# Altium PCB Boost.PcbDoc
Units mm, origin at the board's own origin, x right, y up, seen from the top; angles counter-clockwise.
Board outline 55.14 x 49.68 mm, 2 copper layers (Top Layer, Bottom Layer); 20 components, 7 nets, 39 pads, 67 vias.
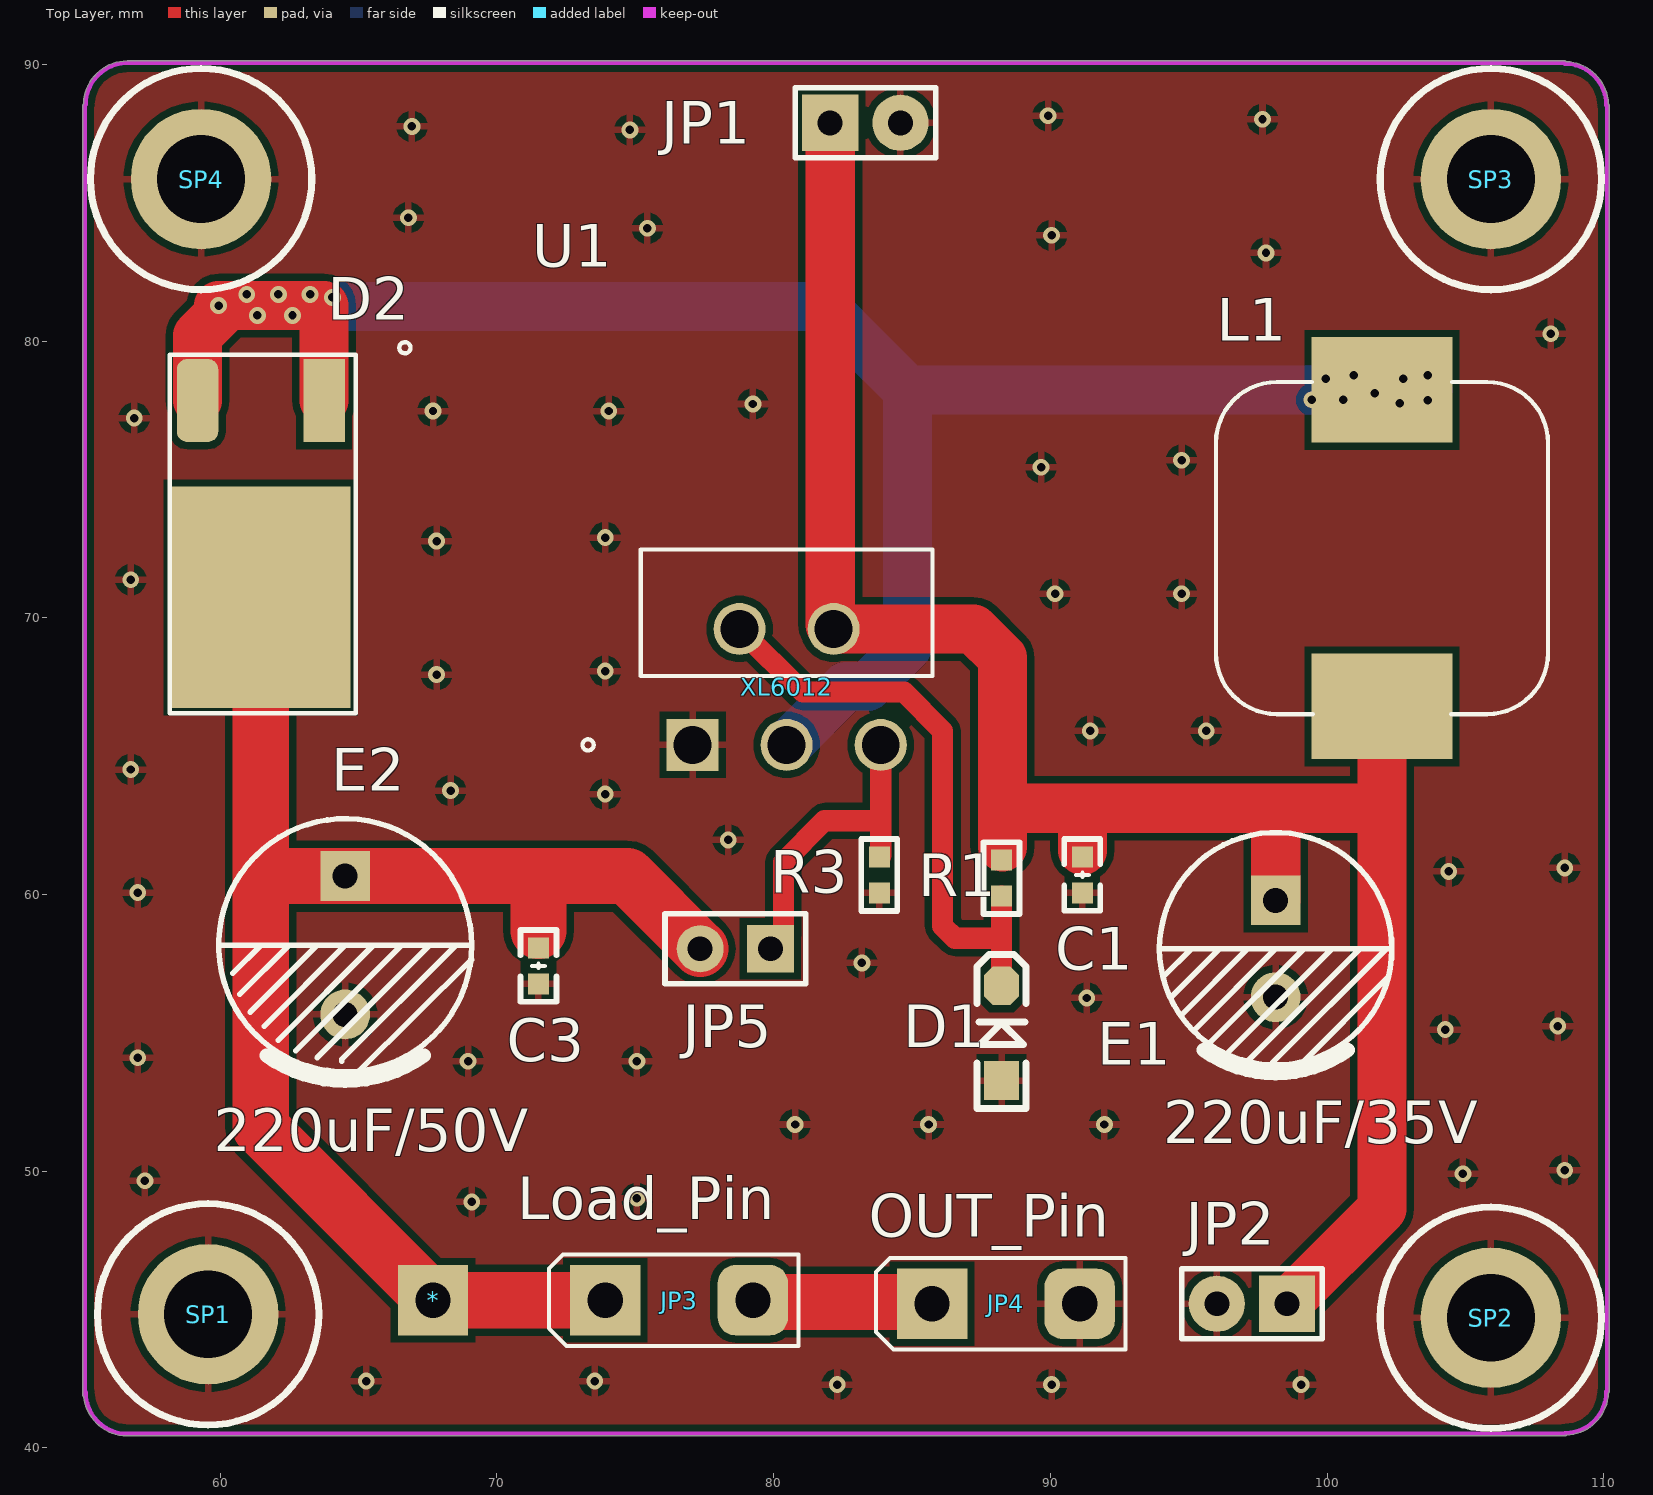
[diagram p0: Top Layer view]
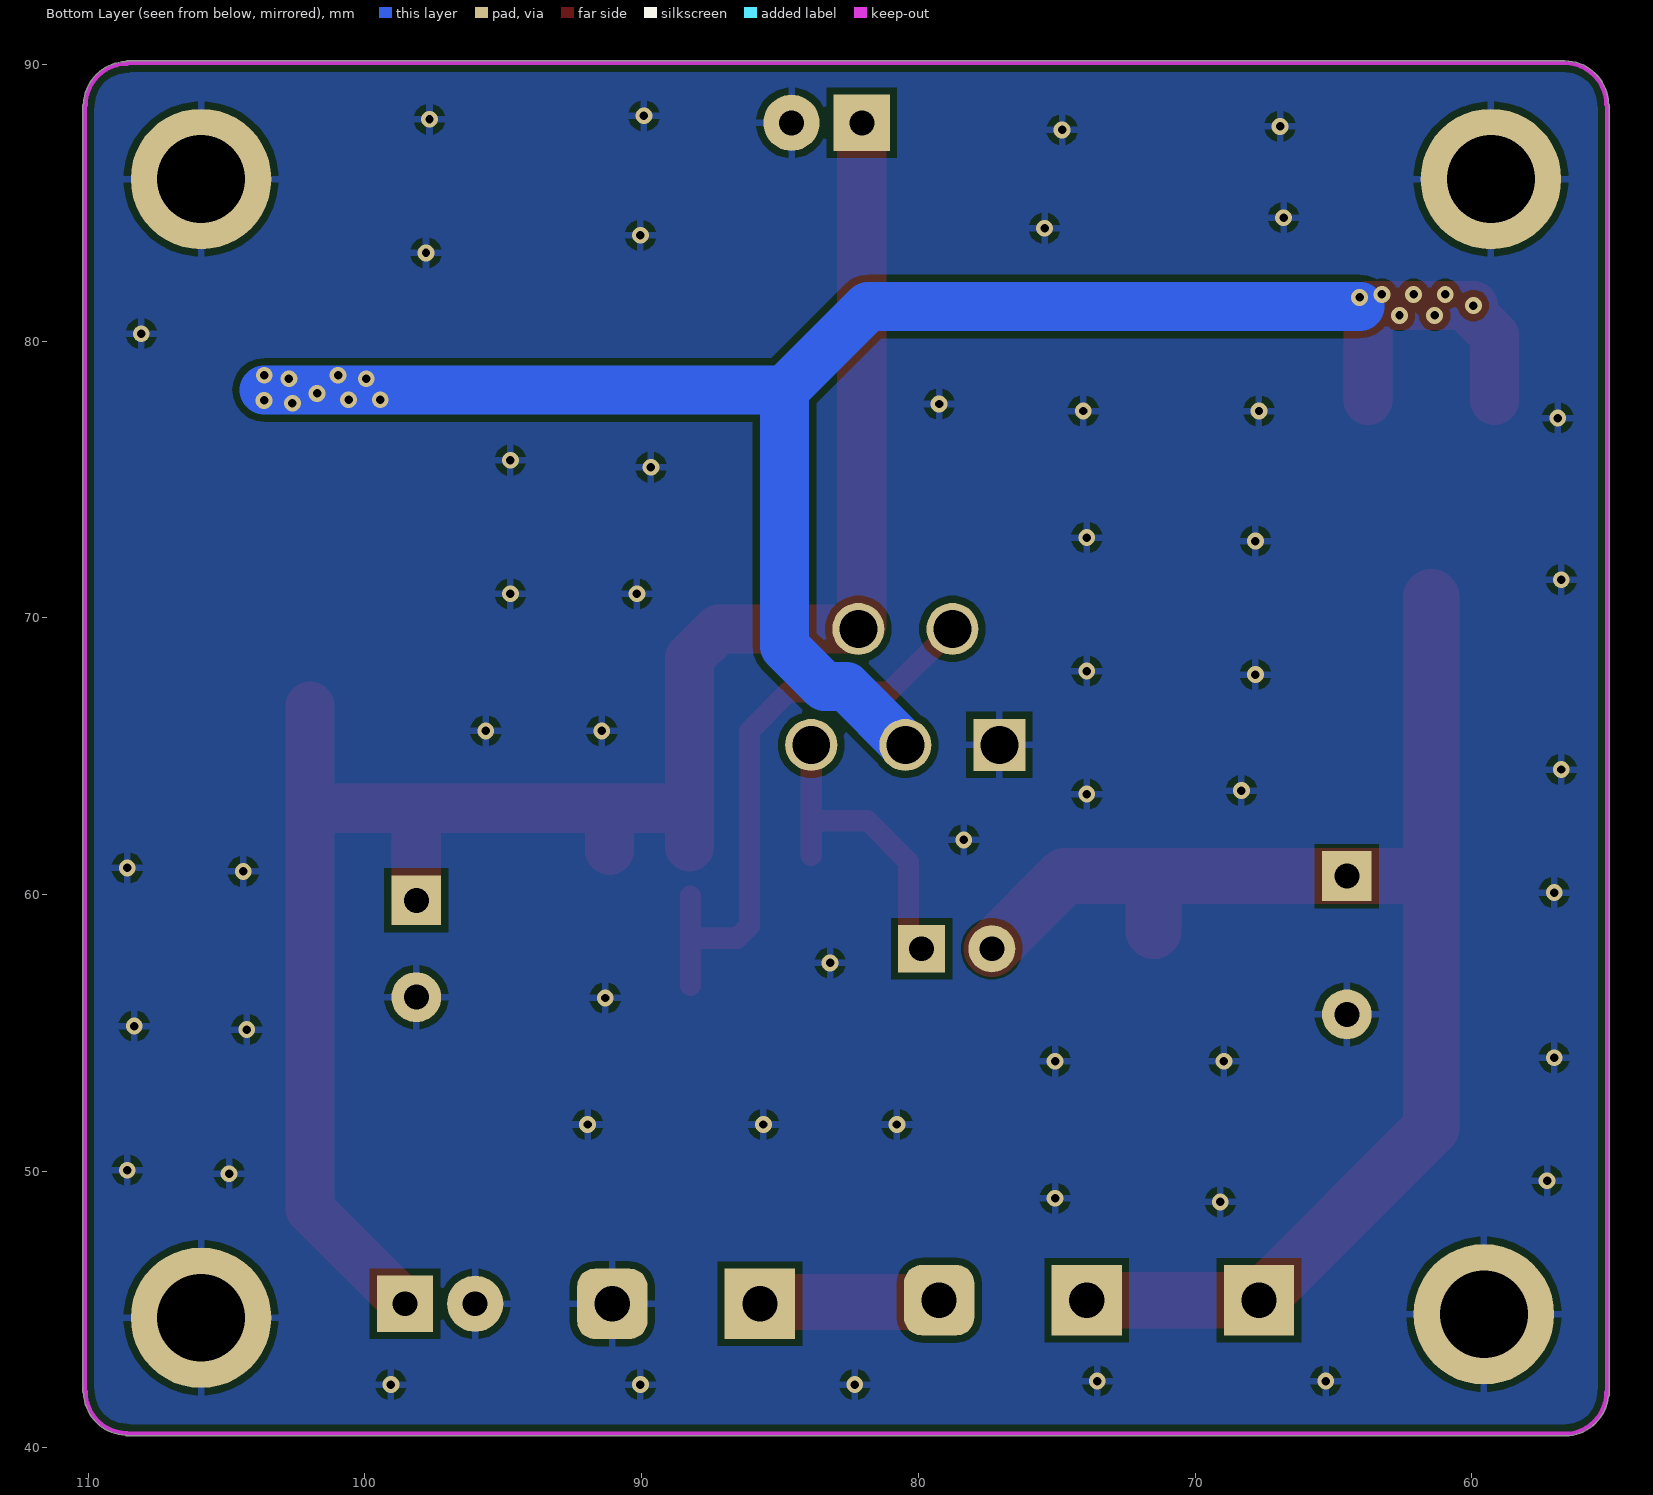
[diagram p1: Bottom Layer view, seen from below]

## Layer stack, top to bottom
Top Solder: solder mask 0.0102, Solder Resist, Dk 3.5
Top Layer: signal copper 0.0356
Dielectric 1: dielectric 0.32, FR-4, Dk 4.8
Bottom Layer: signal copper 0.0356
Bottom Solder: solder mask 0.0102, Solder Resist, Dk 3.5

## Board outline
55.074,41.847 ccw(c56.642,42.013) 56.48,40.445 ccw(c56.515,40.513) 56.515,40.436 108.585,40.436 ccw(c108.585,40.513) 108.642,40.461 ccw(c108.585,42.037) 110.161,41.98 ccw(c110.109,42.037) 110.186,42.037 110.186,88.519 ccw(c110.109,88.519) 110.161,88.576 ccw(c108.585,88.519) 108.642,90.095 ccw(c108.585,90.043) 108.585,90.12 56.642,90.12 ccw(c56.642,88.543) 55.066,88.575 ccw(c55.118,88.519) 55.041,88.519 55.041,41.91 ccw(c55.118,41.91)

## Design rules (kind name [scope] priority, off if disabled: settings)
Clearance [All] p1: gap=0.254 ignorepadtopadclearanceinfootprint=FALSE except(0: Arc-Hole Track-Hole SMDPad-Hole THPad-Hole Via-Hole Fill-Hole Poly-Hole Region-Hole Text-Hole)
PolygonConnect [All] p1: connectstyle=Relief reliefconductorwidth=0.254 reliefentries=4 polygonreliefangle="90 Angle" airgapwidth=0.254
RoutingVias [All] p1: holewidth=0.711 width=1.27 viastyle="Through Hole" minholewidth=0.711 minwidth=1.27 maxholewidth=0.711 maxwidth=1.27
SolderMaskExpansion [All] p1: expansion=0.102 istentingtop=FALSE
Width Width_4 [InNet('NetJP3_2')] p1: maxlimit=2.032 minlimit=1.27 preferedwidth=1.778
Width Width_3 [InNet('VIN')] p2: maxlimit=2.54 minlimit=1.778 preferedwidth=2.032
Width Width_2 [InNet('VOUT')] p3: maxlimit=2.54 minlimit=1.778 preferedwidth=2.032
Width Width_1 [InNet('NetD2_1')] p4: maxlimit=2.54 minlimit=1.778 preferedwidth=2.032
Width [All] p5: maxlimit=2.54 minlimit=0.762 preferedwidth=0.762
30 further rules are at their usual default settings.

## Components (designator, comment, footprint, x,y, rotation, side; value= is the part's Value field where it differs from the comment)
* "V_x" PCBComponent_1 67.691,45.339 r0 top
C1 "105" "C 0603_L" 91.154,60.706 r270 top
C3 "105" "C 0603_L" 71.501,57.419 r270 top
D1 "3V3" SOD-123 88.233,54.991 r90 top
D2 "MBRD1045" TO-252 61.468,72.39 r180 top
E1 "220uF/35V" CAPAER_D080_L125_P035 98.139,58.039 r180 top
E2 "220uF/50V" CAPAER_D100_L130_P055 64.516,58.166 r180 top
JP1 "HDR-1X2" HDR2.54-LI-2P#1 83.312,87.884 r0 top
JP2 "HDR-1X2" HDR2.54-LI-2P#1 97.282,45.212 r180 top
JP3 "Load_Pin" connect 73.914,45.339 r0 top
JP4 "OUT_Pin" connect 85.725,45.212 r0 top
JP5 "HDR-1X2" HDR2.54-LI-2P#2 78.613,58.039 r180 top
L1 "47uH" CD127 101.981,72.517 r180 top
R1 "3K3" "R 0603_L" 88.233,60.594 r90 top
R3 "2K" "R 0603_L" 83.82,60.706 r90 top
SP1 "M3铜柱" M3x4+6_L 59.563,44.831 r0 top
SP2 "M3铜柱" M3x4+6_L 105.918,44.704 r0 top
SP3 "M3铜柱" M3x4+6_L 105.918,85.852 r0 top
SP4 "M3铜柱" M3x4+6_L 59.309,85.852 r0 top
XL6012 "U1" T220-5 77.069,65.405 r0 top

## Footprints (in the part's own frame and the unit in brackets; to place one, negate y for a bottom-side part, rotate by r counter-clockwise, add the part's x,y. Pads: shape width x height; smd on the part's side, far side on the other; paste and mask are expansions set on the pad)
"C 0603_L" [mil] "无极性贴片电容"
  rect 30x30 smd: 1(-25.59,0) 2(25.59,0)
  silkscreen extent -51,-26 51,26, body extent -31,-16 31,16, height 32
CAPAER_D080_L125_P035 [mm]
  rect 1.8x1.8 hole 0.9: 1(0,-1.75)
  round 1.8 hole 0.9: 2(0,1.75)
  silkscreen extent -4.2,-4.2 4.2,4.5, body extent -4,-4 4,4.01, height 12.51
CAPAER_D100_L130_P055 [mm]
  rect 1.8x1.8 hole 0.9: 1(0,-2.5)
  round 1.8 hole 0.9: 2(0,2.5)
  silkscreen extent -4.57,-4.57 4.57,4.9, body extent -5,-5 5,5, height 13
CD127 [mm]
  rect 5.08x3.81 smd: 1(0,5.715) 2(0,-5.715)
  silkscreen extent -6,-6 6,6, body extent -6,-6 6,6, height 7.75
connect [mil]
  rect 100x100 hole 50: 1(0,0)
  rrect50% 100x100 hole 50: 2(210,0)
  silkscreen extent -80,-65 275,65
HDR2.54-LI-2P#1 [mil] "排针，2脚"
  rect 80x80 hole 35.43: 1(-50,0)
  round 80 hole 35.43: 2(50,0)
  silkscreen extent -100,-50 100,50, body extent -100,-50 100,50, height 335
HDR2.54-LI-2P#2 [mil] "排针，2脚"
  rect 66.93x66.93 hole 35.43: 1(-50,0)
  round 66.93 hole 35.43: 2(50,0)
  silkscreen extent -100,-50 100,50, body extent -100,-50 100,50, height 335
M3x4+6_L [mm] "M3铜柱，长：4mm，螺纹长：6mm"
  round 5.08 hole 3.175: 1(0,0)
  silkscreen extent -4,-4 4,4, body extent -2.7,-2.35 2.7,2.35, height 4.05
PCBComponent_1 [mm]
  rect 2.54x2.54 hole 1.27: 1(0,0)
"R 0603_L" [mil] "1/10W贴片电阻"
  rect 30x30 smd: 1(-25.59,0) 2(25.59,0)
  silkscreen extent -51,-26 51,26, body extent -31,-16 32,16, height 16
SOD-123 [mil] "2.7x1.6X1.1mm（长宽高，不包括引脚）"
  rect 55x50 smd: 1(-67.5,0)
  oct 55x50 smd: 2(67.5,0)
  silkscreen extent -108,-35 112,35, body extent -73,-31 73,31, height 48
T220-5 [mil]
  rect 74x74 / inner round 60 / far side rect 74x74 hole 54: 1(0,0)
  round 74 / inner round 60 / far side round 74 hole 54: 2(66.93,165) 3(133.86,0) 4(200.79,165) 5(267.72,0)
  silkscreen extent -157,-8 341,278, body extent -355,2 629,660, height 980
TO-252 [mm]
  rect 1.5x3 smd: 1(-2.286,-5.461)
  rrect50% 1.5x3 smd: 3(2.286,-5.461)
  rect 6.5x8 smd: 4(0,1.651)
  silkscreen extent -5.41,-7.57 3.29,5.84, body extent -3.29,-5.47 3.29,4.23, height 2.3

## Part data
C1 C3: library part C, "无极性贴片电容", BOM名称=无极性贴片电容, 学习资源=www.ooocke.com, 版权归属=源创客
D1: library part 1N4007, "整流二极管", BOM名称=整流二极管, 学习资源=www.ooocke.com, 版权归属=源创客
E1 E2: library part C-CAP, "直插电解电容", BOM名称=直插电解电容, 学习资源=www.ooocke.com, 版权归属=源创客
JP1 JP2 JP5: library part "Header 2", "2P接插件", BOM名称=2P接插件, 学习资源=www.ooocke.com, 版权归属=源创客
L1: library part L-CD, "贴片功率电感", BOM名称=功率电感, 学习资源=www.ooocke.com, 版权归属=源创客
R1 R3: library part R, "贴片电阻", BOM名称=贴片电阻, 学习资源=www.ooocke.com, 版权归属=源创客
SP1 SP2 SP3 SP4: library part 铜柱加头小焊盘, "铜柱", BOM名称=铜柱, 学习资源=www.ooocke.com, 版权归属=源创客
XL6012: library part XL6012

## Via types
v1: diameter 0.61/0.61 (per signal layer), hole 0.305, Top Layer to Bottom Layer, 67 vias

## Nets (pads, with @x,y where several pads share a name; then routed paths per layer and width w, separated by ;. In a path a pad name is that pad's centre, name@x,y a point inside that pad or via, vN(x,y) a via of type N, cw(c..) or ccw(c..) an arc to the next point about the centre after c; other vN are vias at no path point)
GND: C1.2 C3.2 D1.1 E1.2 E2.2 JP1.2 JP2.2 JP4.2 R3.1 SP1.1 SP2.1 SP3.1 SP4.1 XL6012.1
  other v1: 82.296,42.291 90.043,42.291 99.06,42.291 65.278,42.418 73.533,42.418 69.088,48.895 75.057,49.022 57.277,49.657 104.902,49.911 108.585,50.038 80.772,51.689 85.598,51.689 91.948,51.689 68.961,53.975 75.057,53.975 57.023,54.102 104.267,55.118 108.331,55.245 91.313,56.261 83.185,57.531 57.023,60.071 104.394,60.833 108.585,60.96 78.359,61.976 73.914,63.627 68.326,63.754 56.769,64.516 91.44,65.913 95.631,65.913 67.818,67.945 73.914,68.072 90.17,70.866 94.742,70.866 56.769,71.374 67.818,72.771 73.914,72.898 89.662,75.438 94.742,75.692 56.896,77.216 67.691,77.47 74.041,77.47 79.248,77.724 108.077,80.264 97.79,83.185 90.043,83.82 75.438,84.074 66.802,84.455 74.803,87.63 66.929,87.757 97.663,88.011 89.916,88.138
NetD1_2: D1.2 R1.1 XL6012.2 | length 21.5
  Top Layer w0.762: XL6012.2 81.055,67.31 84.709,67.31 86.106,65.913 86.106,58.866 86.552,58.42 88.233,58.42 ; D1.2 88.233,58.42 ; R1.1 88.233,58.42
NetD2_1: D2.1 D2.3 L1.2 XL6012.3 | length 67
  Top Layer w1.778: D2.3 59.182,80.203 v1@60.224,81.244 ; v1(59.944,81.28) 63.754,81.28 D2.1 ; XL6012.3 XL6012.3@80.496,65.405
  Bottom Layer w1.778: 64.052,81.244 81.824,81.244 84.836,78.232 ; XL6012.3 80.496,65.405 82.605,67.513 83.388,67.513 84.836,68.961 84.836,78.232 ; 103.632,78.232 101.727,78.232 84.836,78.232
  other v1: 102.618,77.749 103.638,77.852 99.443,77.876 100.586,77.876 101.727,78.105 99.951,78.638 102.745,78.638 100.967,78.765 103.634,78.765 61.343,80.924 62.613,80.924 64.052,81.575 60.962,81.686 62.105,81.686 63.248,81.686
NetJP3_2: JP3.2 JP4.1 | length 6.5
  Top Layer w2.032: JP3.2 79.311,45.276 85.661,45.276 JP4.1
Rx: JP5.1 R3.2 XL6012.5 | length 11.6
  Top Layer w0.762: JP5.1 80.352,58.508 80.352,61.175 81.843,62.666 83.621,62.666 83.869,62.914 ; R3.2@83.869,61.405 83.869,62.914 ; XL6012.5 83.869,62.914
VIN: C1.1 E1.1 JP1.1 JP2.1 L1.1 R1.2 XL6012.4 | length 73.3
  Top Layer w1.778: JP1.1 82.042,69.75 82.169,69.623 XL6012.4 87.223,69.596 88.265,68.554 88.265,63.119 ; 88.265,61.722 88.265,63.119 ; C1.1@91.154,61.595 91.154,63.087 91.186,63.119 ; E1.1 98.139,63.087 98.171,63.119 ; JP2.1 101.981,48.641 101.981,63.119 ; L1.1 101.981,63.119 ; 88.265,63.119 91.186,63.119 ; 91.186,63.119 98.171,63.119 ; 98.171,63.119 101.981,63.119
VOUT: *.1 C3.1 D2.4 E2.1 JP3.1 JP5.2 | length 53.2
  Top Layer w2.032: D2.4 61.468,60.579 ; 71.501,58.689 71.501,60.666 ; JP3.1 *.1 61.468,51.562 61.468,60.579 ; JP5.2 74.716,60.666 71.501,60.666 ; 61.468,60.579 61.555,60.666 E2.1 71.501,60.666

## Polygon pours and split planes (outlines as drawn)
GND on Top Layer "GND_L01_P000" (solid, pour order 0): 110.109,90.043 110.109,40.64 109.982,40.513 55.118,40.513 55.118,90.043
GND on Bottom Layer "GND_L02_P001" (solid, pour order 1): 55.118,90.043 110.161,90.043 110.161,40.461 55.118,40.461

## Keep-outs
Keep-Out Layer:
  lines w0.152: 55.118,41.91 55.118,88.519 ; 55.142,42.013 ccw(c56.642,42.013) 56.642,40.513 ; 55.142,88.543 cw(c56.642,88.543) 56.642,90.043 108.585,90.043 ; 56.515,40.513 108.585,40.513 ; 108.585,40.537 ccw(c108.585,42.037) 110.085,42.037 ; 108.585,90.019 cw(c108.585,88.519) 110.085,88.519 ; 110.109,42.037 110.109,88.519

## Dimensions
56.515,40.513 to 56.642,90.043 on Top Overlay
55.118,41.91 to 110.109,42.037 on Top Overlay